# EAGLE board HMI Board (EAGLE 9.5.0)
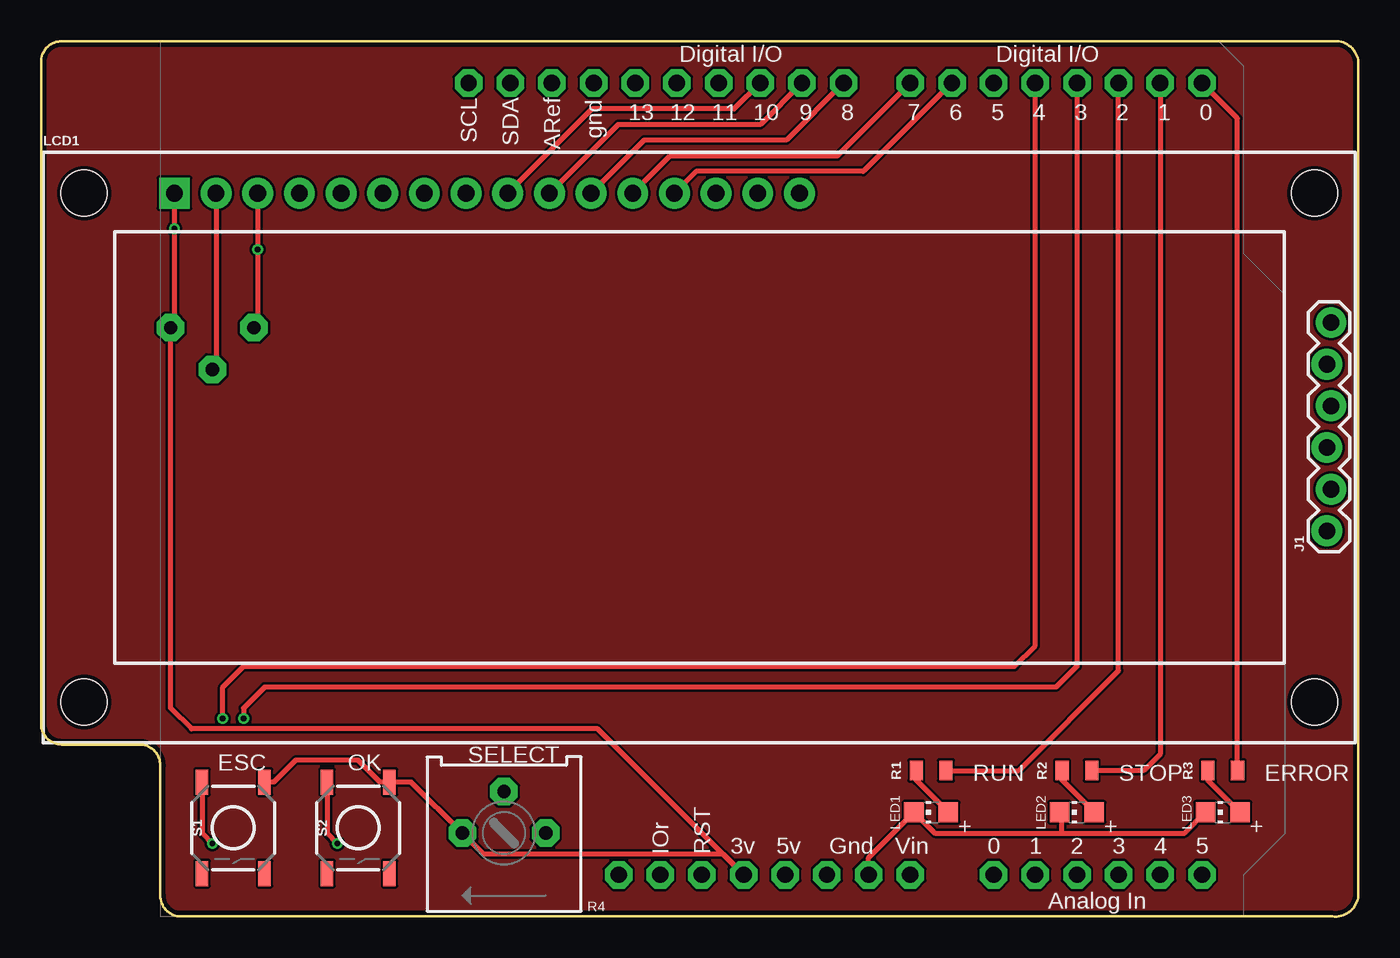
[diagram p0: board, top side]
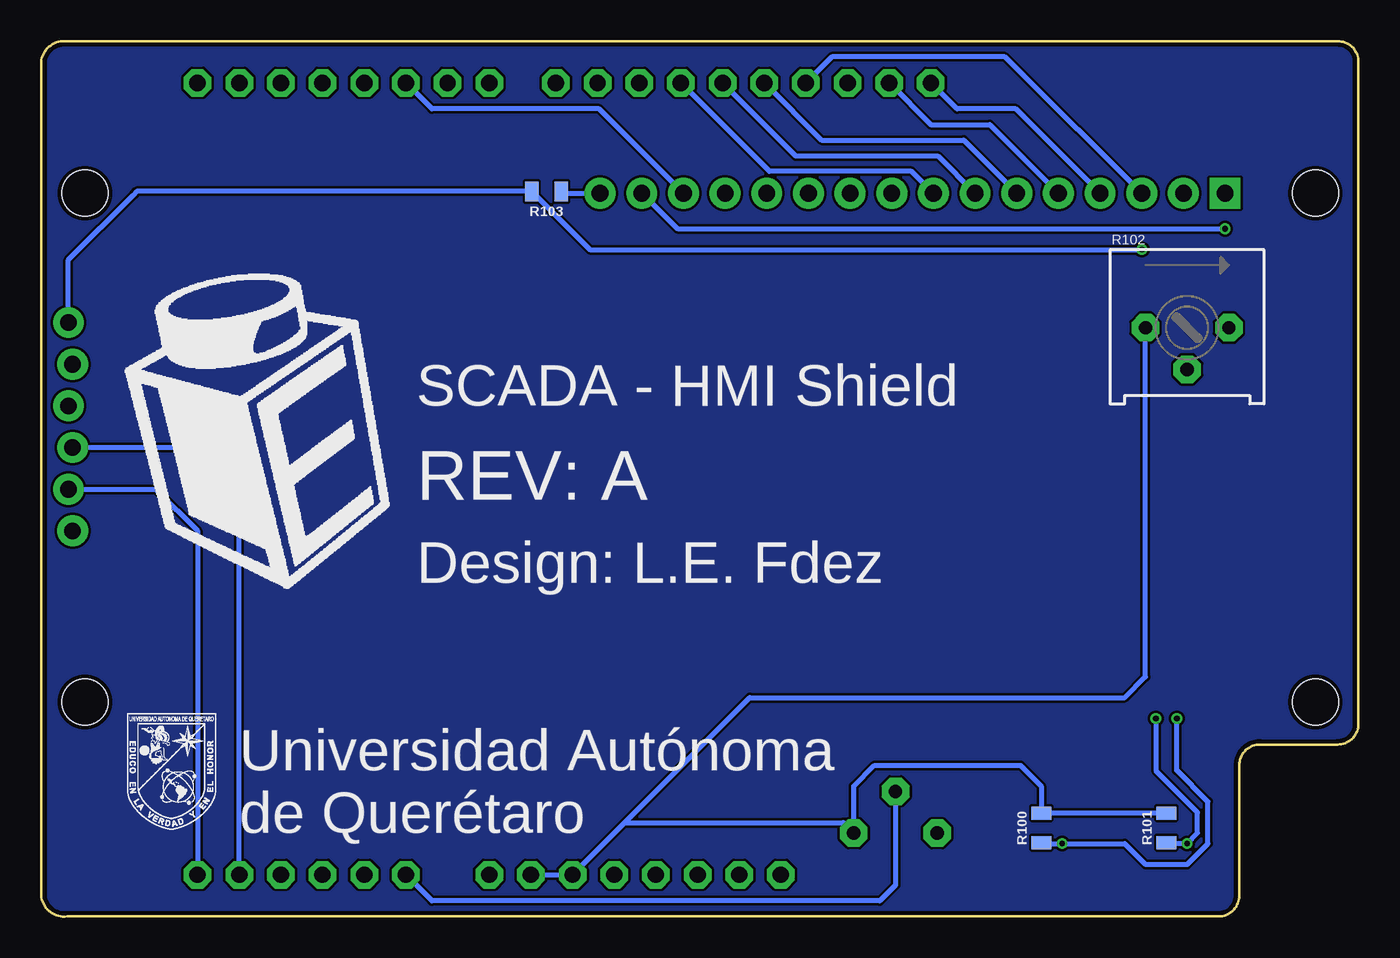
[diagram p1: board, bottom side, seen from below]

Size 80.31 x 53.36 mm. Coordinates in mm from the lower left corner, seen from the top.
Outline: 0,11.76 0,52.08 arc-90 1.27,53.35 78.73,53.35 arc-90 80.31,52.08 80.31,1.28 arc-90 78.73,0.01 8.54,0.01 arc-90 7.27,1.28 7.27,9.22 arc90 6,10.49 1.27,10.49 arc-90 0,11.76
Copper layers (1*16): Top 0.035mm / dielectric 1.5mm / Bottom 0.035mm
Design rules "SeeedStudio_2layer_DRU_no_angle_20140221": minimum track width 6mil, minimum drill 12mil, track to track 6mil, track to pad 6mil, pad to pad 6mil, via to via 6mil, smd to smd 0mil, copper to edge 10mil, drill to drill 10mil, minimum pad ring 10mil, minimum via ring 6mil, stop-mask expansion 2mil, vias tented up to drill 100mil, thermal gap 10mil

## Footprints (pad centres in the part's own frame; a part is rotated, then mirrored left to right if it is on the bottom)
1X06_LOCK = drill 1.016 pad 1.88: 1 0,0; 2 2.54,-0.254; 3 5.08,0; 4 7.62,-0.254; 5 10.16,0; 6 12.7,-0.254
LCD-16X2 = drill 1.016 pad 1.88 square: 1 -32,15.5 | drill 1.016 pad 1.88: 2 -29.46,15.5; 3 -26.92,15.5; 4 -24.38,15.5; 5 -21.84,15.5; 6 -19.3,15.5; 7 -16.76,15.5; 8 -14.22,15.5; 9 -11.68,15.5; 10 -9.14,15.5; 11 -6.6,15.5; 12 -4.06,15.5; 13 -1.52,15.5; 14 1.02,15.5; 15 3.56,15.5; 16 6.1,15.5 | hole 2.8: -37.5,15.5; -37.5,-15.5; 37.5,15.5; 37.5,-15.5
CHIP-LED0805 = smd 1.2 x 1.2: A 0,-1.05; C 0,1.05
0805 = smd 0.8 x 1.2: 1 -0.9,0; 2 0.9,0
3386P = drill 0.813 pad 1.676 octagon: 1 -2.54,0; 2 0,-2.54; 3 2.54,0
TACTILE_SWITCH_SMD_5.2MM = smd 1.524 x 0.762: 1 -2.794,1.905; 2 2.794,1.905; 3 -2.794,-1.905; 4 2.794,-1.905
ARDUINOR3-NODIM = drill 1 pad 1.676 octagon: 3V 35.56,2.54; 5V 38.1,2.54; A0 50.8,2.54; A1 53.34,2.54; A2 55.88,2.54; A3 58.42,2.54; A4 60.96,2.54; A5 63.5,2.54; AREF 23.876,50.8; D0 63.5,50.8; D1 60.96,50.8; D2 58.42,50.8; D3 55.88,50.8; D4 53.34,50.8; D5 50.8,50.8; D6 48.26,50.8; D7 45.72,50.8; D8 41.656,50.8; D9 39.116,50.8; D10 36.576,50.8; D11 34.036,50.8; D12 31.496,50.8; D13 28.956,50.8; GND 26.416,50.8; GND1 43.18,2.54; GND2 40.64,2.54; IOREF 30.48,2.54; RESERVED 27.94,2.54; RESET 33.02,2.54; SCL 18.796,50.8; SDA 21.336,50.8; VIN 45.72,2.54

## Placement (x,y rotation side)
J1  [1X06_LOCK]  78.39,23.5 90 top
LCD1  LCD-16X2SILK  [LCD-16X2]  40.13,28.58 0 top
LED1  [CHIP-LED0805]  54.26,6.36 90 top
LED2  [CHIP-LED0805]  63.15,6.36 90 top
LED3  [CHIP-LED0805]  72.04,6.36 90 top
R1  100E  [0805]  54.26,8.9 0 top
R2  100E  [0805]  63.15,8.9 0 top
R3  100E  [0805]  72.04,8.9 0 top
R4  [3386P]  28.23,5.09 180 top
R100  1k  [0805]  19.34,5.41 90 bottom
R101  1k  [0805]  11.71,5.41 90 bottom
R102  [3386P]  10.45,35.89 0 bottom
R103  1k  [0805]  49.5,44.19 180 bottom
S1  MOMENTARY-SWITCH-SPST-SMD-5.2MM  [TACTILE_SWITCH_SMD_5.2MM]  11.71,5.41 270 top
S2  MOMENTARY-SWITCH-SPST-SMD-5.2MM  [TACTILE_SWITCH_SMD_5.2MM]  19.34,5.41 270 top
U1  ARDUINOR3NODIM  [ARDUINOR3-NODIM]  7.27,0.01 0 top

## Library data of the parts
J1 = SparkFun-Connectors
LCD1 = SparkFun-Displays; SF_ID: LCD-00255
LED1-LED3 = adafruit
R1-R3 R100 R101 R103 = SparkFun-Resistors
R4 R102 = bourns
S1 S2 = SparkFun-Switches; PROD_ID: SWCH-08247; SF_SKU: COM-08720
U1 = microbuilder

## Nets
GND: J1.6 LCD1.3 LED1.C LED2.C LED3.C R4.1 R100.2 R101.2 R102.1 R103.2 U1.GND U1.GND1 U1.GND2
N$1: LCD1.14 U1.D5
N$2: LCD1.13 U1.D6
N$3: LCD1.12 U1.D7
N$4: LCD1.11 U1.D8
N$5: LCD1.10 U1.D9
N$6: LCD1.9 U1.D10
N$7: LCD1.8 U1.D11
N$8: LCD1.7 U1.D12
N$9: R1.2 U1.D2
N$10: LCD1.5 U1.SDA
N$11: LCD1.4 U1.SCL
N$12: R4.2 U1.A0
N$13: LED1.A R1.1
N$14: J1.3 U1.A4
N$15: J1.2 U1.A5
N$16: LED2.A R2.1
N$17: LED3.A R3.1
N$18: LCD1.2 R102.2
N$19: LCD1.16 R103.1
N$20: LCD1.6 U1.D13
N$21: R100.1 S2.3 U1.D4
N$22: R101.1 S1.3 U1.D3
N$24: R3.2 U1.D0
N$25: U1.5V
N$26: R2.2 U1.D1
VCC: LCD1.1 LCD1.15 R4.3 R102.3 S1.1 S2.1 U1.3V
VIN: U1.VIN

## Tracks (layer width: path | path; a pad name or v marks a point on that pad's centre or on a via)
COPPER
  pour Top: 0,11.76 0,52.08 arc-90 1.27,53.35 79.03,53.35 arc-90 80.3,52.08 80.3,1.28 arc-90 79.03,0.01 8.54,0.01 arc-90 7.27,1.28 7.27,9.22 arc90 6,10.49 1.27,10.49 arc-90
  pour Bottom: 1.27,53.35 79.03,53.35 arc-90 80.3,52.08 80.3,1.28 arc-90 79.03,0.01 8.54,0.01 arc-90 7.27,1.28 7.27,9.22 arc90 6,10.49 1.27,10.49 arc-90 0,11.76 0,52.08 arc-90
GND  (via drill 0.35)
  Top 0.305: LCD1.3 v13.21,40.65 13.21,36.11 R102.1 | U1.GND1 50.45,3.6 LED1.C 54.48,5.09 62.2,5.09 | LED3.C 69.72,5.09 62.2,5.09 | LED2.C 62.2,6.26 62.2,5.09
  Bottom 0.305: R101.2 R100.2 19.34,7.95 20.61,9.22 29.5,9.22 30.77,7.95 R4.1 31.4,5.72 44.73,5.72 | LCD1.3 17.08,47.95 17.11,47.95 21.56,52.4 32.1,52.4 U1.GND | 44.73,5.72 U1.GND2 U1.GND1 | v13.21,40.65 46.86,40.65 R103.2 74.47,44.19 74.71,43.95 78.64,40.01 J1.6 | 44.73,5.72 37.11,13.34 14.26,13.34 12.98,14.61 R102.1
N$1
  Bottom 0.305: LCD1.14 46.29,49.22 56.48,49.22 U1.D5
N$2
  Top 0.305: U1.D6 50.13,45.41 39.94,45.41 LCD1.13
N$3
  Top 0.305: LCD1.12 38.35,46.36 48.55,46.36 U1.D7
N$4
  Top 0.305: U1.D8 45.43,47.32 36.76,47.32 LCD1.11
N$5
  Top 0.305: U1.D9 43.85,48.27 35.18,48.27 LCD1.10
N$6
  Top 0.305: U1.D10 42.26,49.22 33.59,49.22 LCD1.9
N$7
  Bottom 0.305: LCD1.8 27.24,45.41 35.91,45.41 U1.D11
N$8
  Bottom 0.305: U1.D12 34.32,46.36 25.65,46.36 LCD1.7
N$9
  Top 0.305: R1.2 59.6,8.9 65.69,14.98 U1.D2
N$10
  Bottom 0.305: U1.SDA 26.07,48.27 22.48,48.27 LCD1.5
N$11
  Bottom 0.305: LCD1.4 20.89,49.22 24.48,49.22 U1.SCL
N$12
  Bottom 0.305: R4.2 28.23,1.91 29.18,0.96 56.48,0.96 U1.A0
N$13
  Top 0.305: LED1.A 53.36,8.31 R1.1
N$14
  Bottom 0.305: U1.A4 68.23,26.04 70.77,28.58 J1.3
N$15
  Bottom 0.305: J1.2 73.31,26.04 70.77,23.5 U1.A5
N$16
  Top 0.305: LED2.A 62.25,8.31 R2.1
N$17
  Top 0.305: LED3.A 71.14,8.31 R3.1
N$18
  Top 0.305: LCD1.2 10.67,33.57 R102.2
N$19
  Bottom 0.305: R103.1 48.49,44.08 LCD1.16
N$20
  Bottom 0.305: U1.D13 32.73,47.32 24.06,47.32 LCD1.6
N$21  (via drill 0.35)
  Top 0.305: v11.08,12.07 11.08,13.98 12.35,15.25 59.34,15.25 60.61,16.52 U1.D4 | S2.3 17.43,5.09 v18.06,4.45
  Bottom 0.305: v11.08,12.07 11.08,8.91 9.18,7.01 9.18,4.45 10.45,3.18 12.98,3.18 14.26,4.45 v18.06,4.45 19.28,4.45 R100.1
N$22  (via drill 0.35)
  Top 0.305: v12.35,12.07 12.35,12.71 13.62,13.98 61.88,13.98 63.15,15.25 U1.D3 | S1.3 9.81,5.09 v10.45,4.45
  Bottom 0.305: v12.35,12.07 12.35,8.9 9.81,6.36 9.81,5.09 v10.45,4.45 11.66,4.45 R101.1
N$24
  Top 0.305: R3.2 72.94,48.64 U1.D0
N$26
  Top 0.305: U1.D1 68.23,9.9 67.22,8.9 R2.2
VCC  (via drill 0.35)
  Top 0.305: LCD1.1 v8.13,41.92 8.13,36.11 R102.3 7.91,12.71 9.18,11.44 33.94,11.44 U1.3V 41.56,3.82 26.95,3.82 R4.3 22.57,8.2 S2.1 20.67,8.2 19.34,9.53 15.53,9.53 14.19,8.2 S1.1
  Bottom 0.305: LCD1.15 41.53,41.92 v8.13,41.92

## Text on the board
tPlace: ESC | OK | SELECT | RUN | STOP | ERROR
bPlace: SCADA - HMI Shield | REV: A | Design: L.E. Fdez | Universidad Autónoma / de Querétaro